# Altium PCB УШЯИ 758727.206-1.PcbDoc (part 1 of 2)
Units mm, origin at the board's own origin, x right, y up, seen from the top; angles counter-clockwise.
Board outline 245 x 230 mm, 2 copper layers (Top Layer, Bottom Layer), stack 1.571 mm thick; 127 components, 117 nets, 572 pads, 132 vias.
Unrouted connection lines stored in the file: 2.
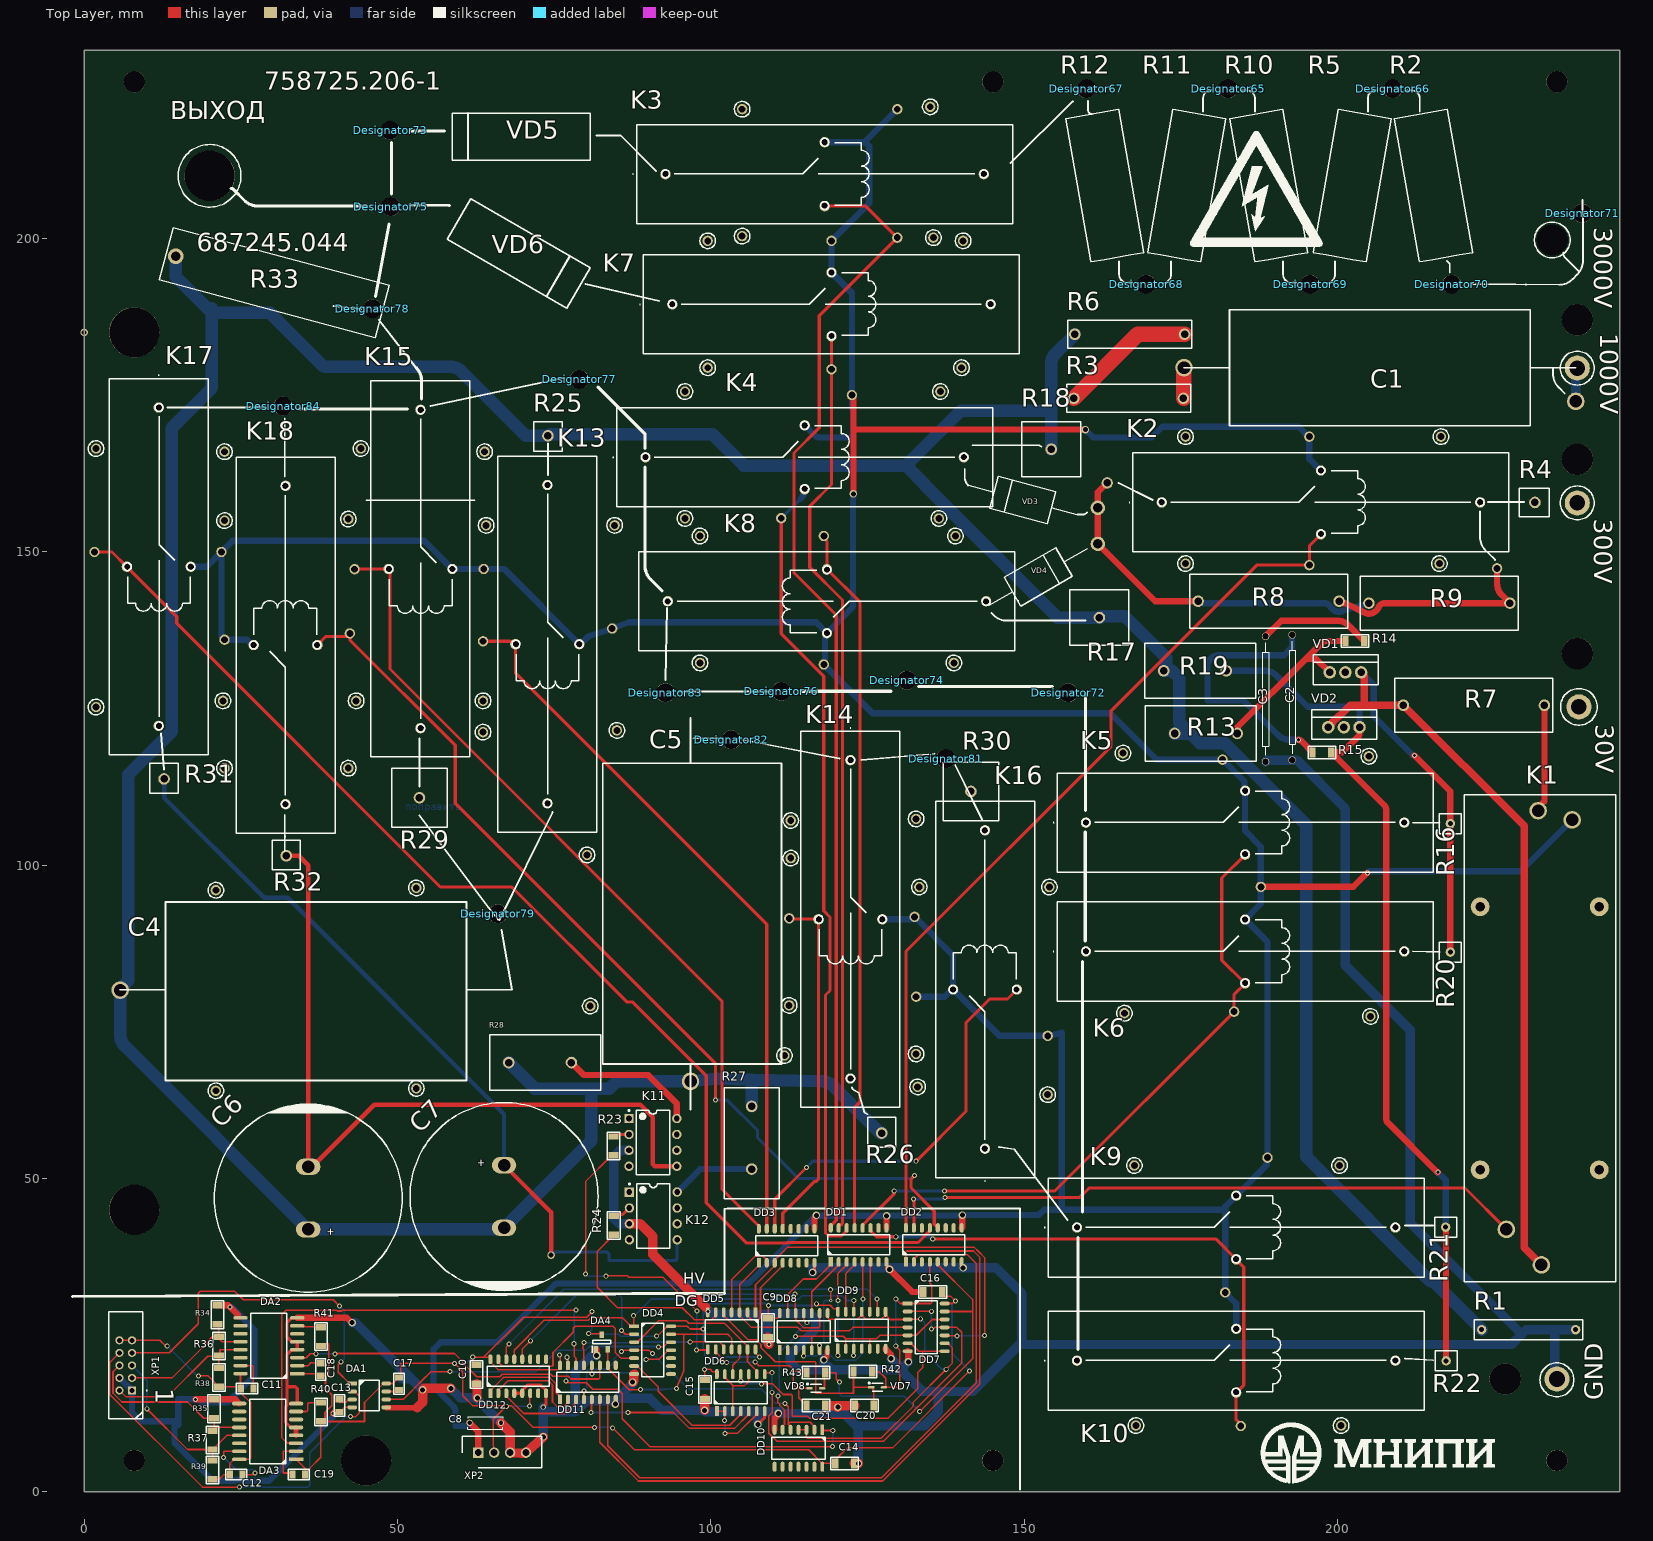
[diagram p0: Top Layer view]
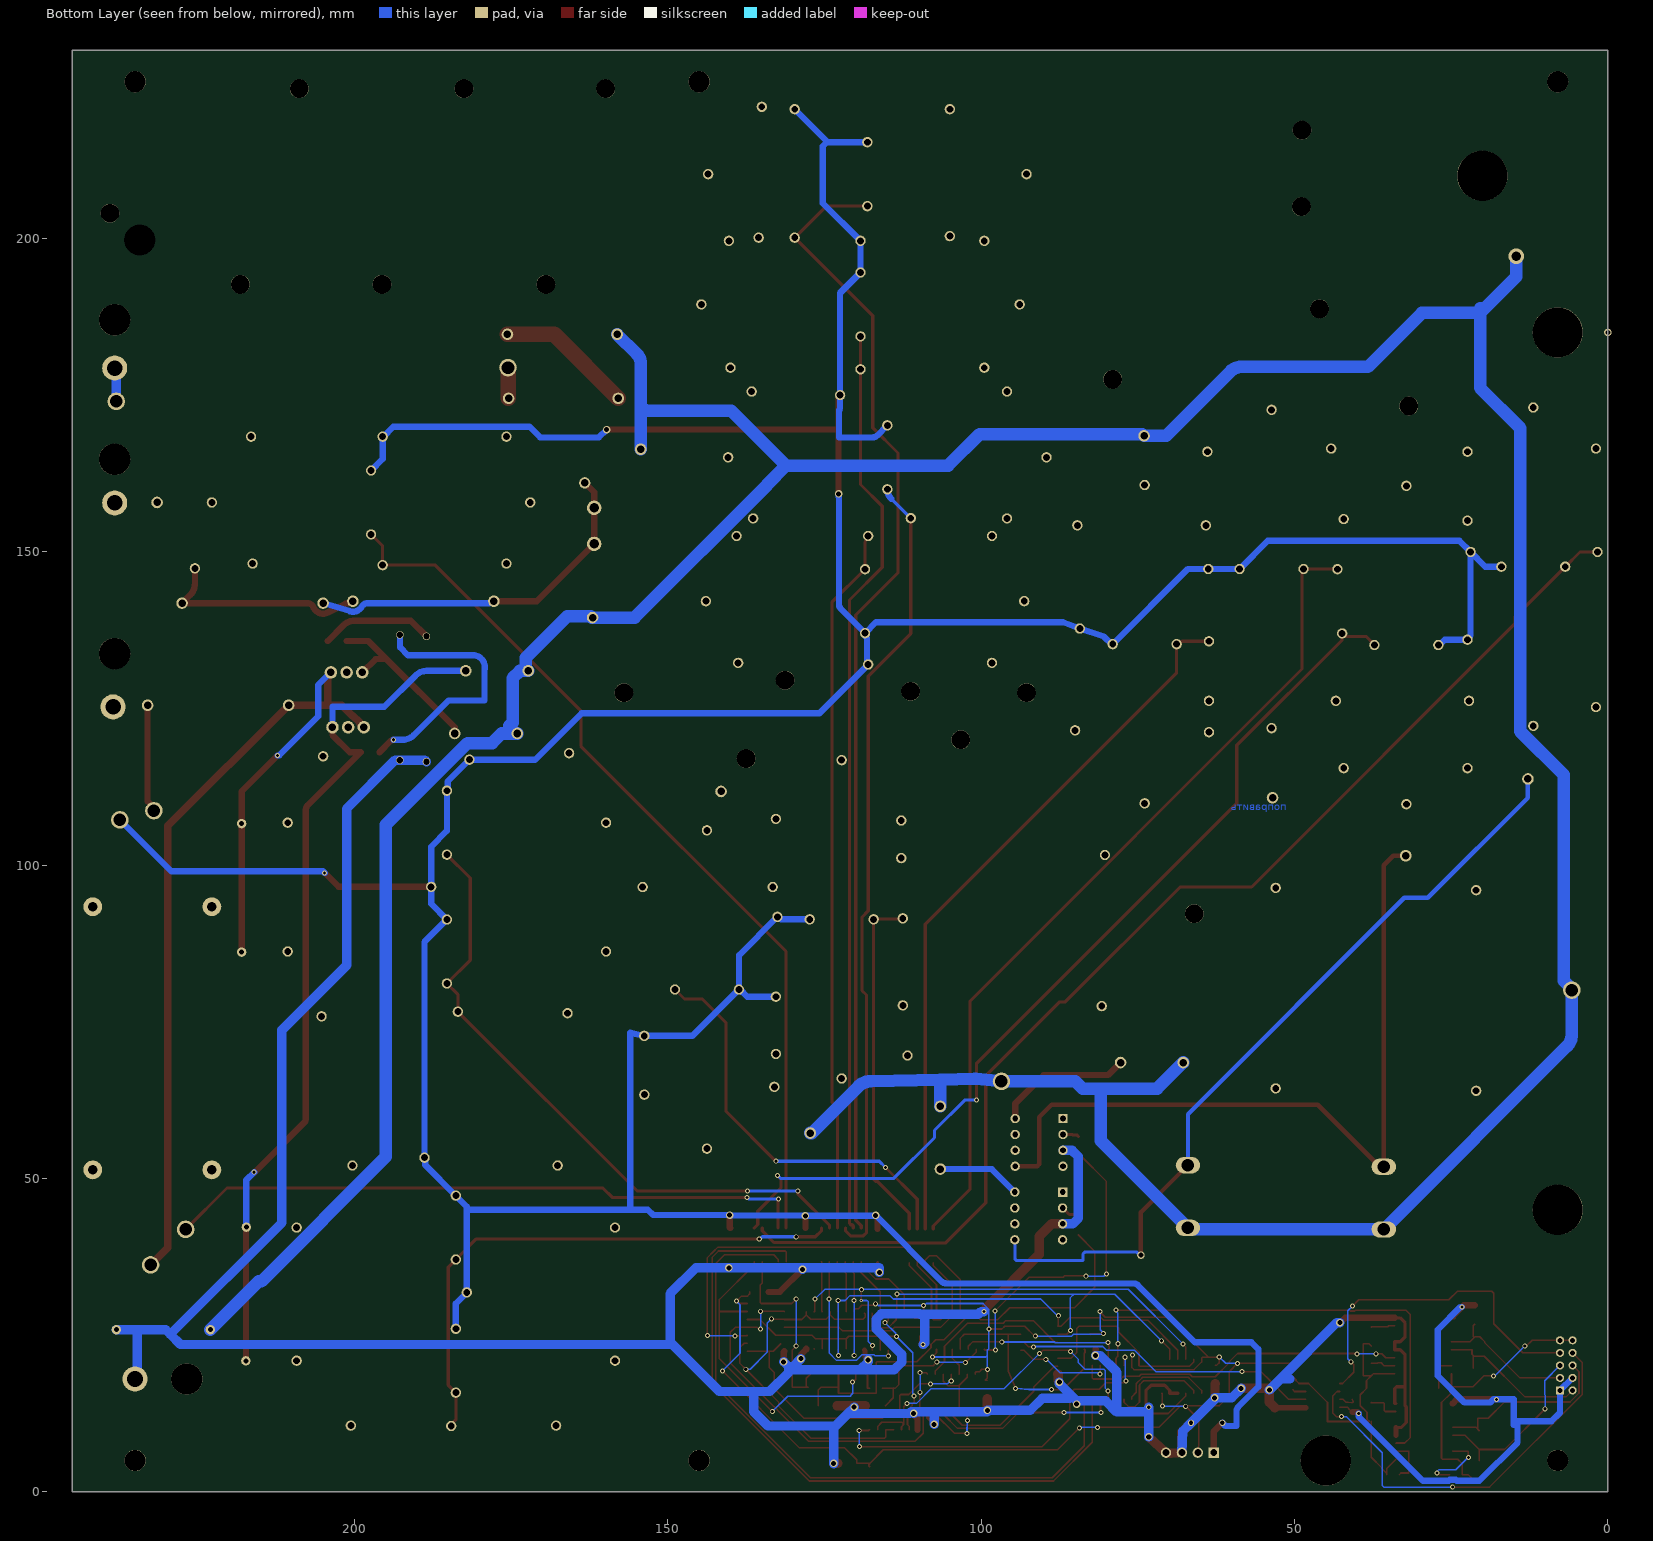
[diagram p1: Bottom Layer view, seen from below]
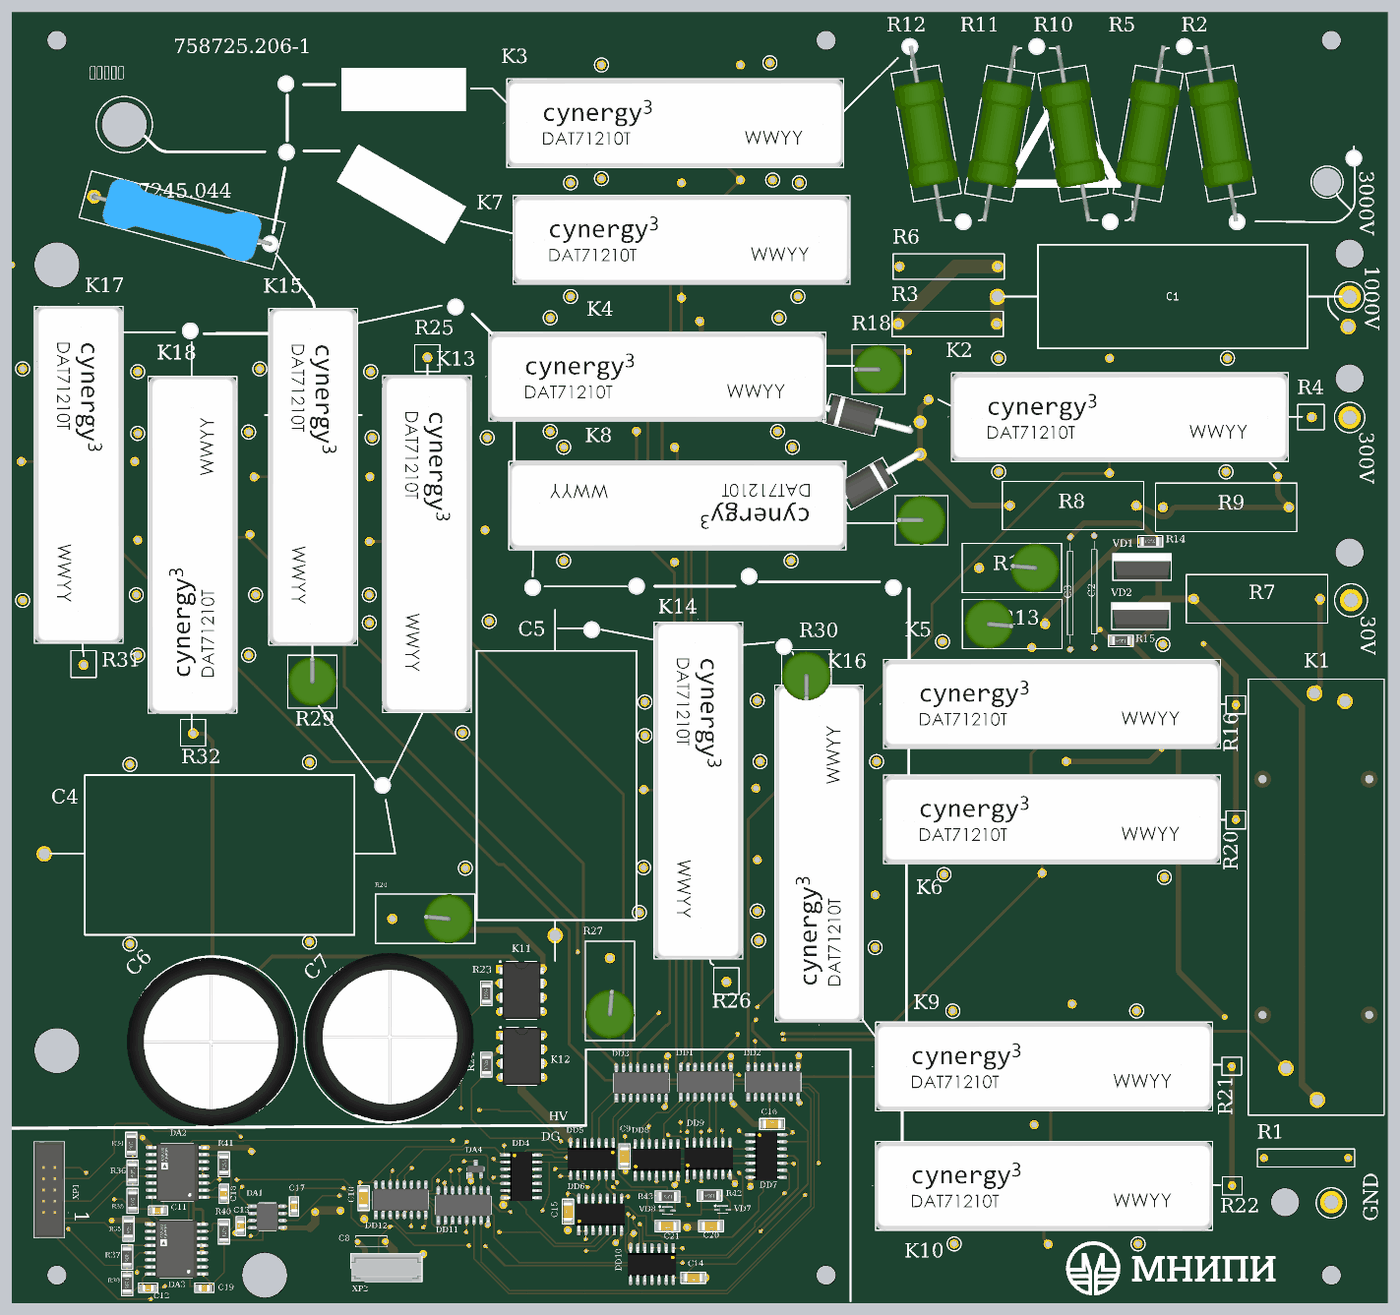
[diagram p3: 3D render of the assembled board from above, using the file's embedded part models]

## Layer stack, top to bottom
Top Solder: solder mask 0.0102, Solder Resist, Dk 3.5
Top Layer: signal copper 0.0356
Dielectric 1: dielectric 1.5, FR-4, Dk 4.8
Bottom Layer: signal copper 0.0356
Bottom Solder: solder mask 0.0102, Solder Resist, Dk 3.5

## Board outline
0,0 0,230 245,230 245,0

## Design rules (kind name [scope] priority, off if disabled: settings)
Clearance [All] p1: gap=0.254 ignorepadtopadclearanceinfootprint=FALSE
PolygonConnect [All] p1: connectstyle=Relief reliefconductorwidth=0.254 reliefentries=4 polygonreliefangle="90 Angle" airgapwidth=0.254
RoutingVias [All] p1: holewidth=0.5 width=0.8 viastyle="Through Hole" minholewidth=0.5 minwidth=0.8 maxholewidth=0.5 maxwidth=0.8
SolderMaskExpansion [All] p1: expansion=0.102 istentingtop=FALSE
SupplyNets "Schematic Supply Nets_1" [InNet('+3.3Vn')] p1: voltage=0.000
SupplyNets "Schematic Supply Nets" [InNet('+5V')] p2: voltage=0.000
SupplyNets "Schematic Supply Nets_41" [InNet('O10')] p3: voltage=0.000
SupplyNets "Schematic Supply Nets_40" [InNet('N14')] p4: voltage=0.000
SupplyNets "Schematic Supply Nets_39" [InNet('O6')] p5: voltage=0.000
SupplyNets "Schematic Supply Nets_38" [InNet('O4')] p6: voltage=0.000
SupplyNets "Schematic Supply Nets_37" [InNet('O7')] p7: voltage=0.000
SupplyNets "Schematic Supply Nets_36" [InNet('O8')] p8: voltage=0.000
SupplyNets "Schematic Supply Nets_35" [InNet('O1')] p9: voltage=0.000
SupplyNets "Schematic Supply Nets_34" [InNet('O3')] p10: voltage=0.000
SupplyNets "Schematic Supply Nets_33" [InNet('O9')] p11: voltage=0.000
SupplyNets "Schematic Supply Nets_32" [InNet('\O10')] p12: voltage=0.000
SupplyNets "Schematic Supply Nets_31" [InNet('\O9')] p13: voltage=0.000
SupplyNets "Schematic Supply Nets_30" [InNet('N13')] p14: voltage=0.000
SupplyNets "Schematic Supply Nets_29" [InNet('O2')] p15: voltage=0.000
SupplyNets "Schematic Supply Nets_28" [InNet('O5')] p16: voltage=0.000
SupplyNets "Schematic Supply Nets_26" [InNet('O14')] p17: voltage=0.000
SupplyNets "Schematic Supply Nets_25" [InNet('GNDI')] p18: voltage=0.000
SupplyNets "Schematic Supply Nets_24" [InNet('O13')] p19: voltage=0.000
SupplyNets "Schematic Supply Nets_12" [InNet('GND')] p20: voltage=0.000
SupplyNets "Schematic Supply Nets_11" [InNet('GNDN')] p21: voltage=0.000
SupplyNets "Schematic Supply Nets_5" [InNet('+12')] p22: voltage=0.000
Width +12 [InNet('+12')] p1: maxlimit=1 minlimit=1 preferedwidth=1
Width [All] p2: maxlimit=2 minlimit=0.25 preferedwidth=0.5
30 further rules are at their usual default settings.

## Classes and differential pairs
component class УШЯИ.687245.044Э3_1: C1 C2 C3 C4 C5 C6 C7 DD1 DD2 DD3 K1 K2 K3 K4 K5 K6 K7 K8 K9 K10 K11 K12 K13 K14 K15 K16 K17 K18 R1 R2 R3 R4 R5 R6 R7 R8 R9 R10 R11 R12 R13 R14 R15 R16 R17 R18 R19 R20 R21 R22 R23 R24 R25 R26 R27 R28 R29 R30 R31 R32 R33 U1 U2 U3 U4 U5 U6 U7 U8 U9 VD1 VD2 VD3 VD4 VD5 VD6 X1 X2 X3 X4 X5
component class УШЯИ.687245.044Э3_2: C8 C9 C10 C11 C12 C13 C14 C15 C16 C17 C18 C19 C20 C21 DA1 DA2 DA3 DA4 DD4 DD5 DD6 DD7 DD8 DD9 DD10 DD11 DD12 R40 R41 R42 R43 VD7 VD8 XP1 XP2

## Components (designator, comment, footprint, x,y, rotation, side; value= is the part's Value field where it differs from the comment)
C1 "К73-14М-4 кВ-0,033 мкФ +-10%" "К73-14М-4 кВ-D18" 206.742,179.365 r0 top
C2 "К73-17-250 В-0,47 мкФ +-20%" К73-17-А20 192.75,136.75 r270 top
C3 "К73-17-250 В-0,47 мкФ +-20%" К73-17-А20 188.5,136.5 r270 top
C4 "К73-14М-4 кВ-0,1 мкФ +-10%" "К73-14М-4 кВ-D28" 36.992,80.115 r180 top
C5 "К73-14М-4 кВ-0,1 мкФ +-10%" "К73-14М-4 кВ-D28" 96.75,92.25 r270 top
C6 "LGG2G331MELB30" "CAP TH ALUM ELEC D30.00mm S10.00mm H30.00mm" 35.742,46.865 r270 top
C7 "LGG2G331MELB30" "CAP TH ALUM ELEC D30.00mm S10.00mm H30.00mm" 66.992,47.115 r90 top
C8 "К10-17б-M1500-1200 пФ +-5%" К10-17Б-L5.6 61.5,11 r0 top
C9 "1206-X7R-50 B-0,33 мкФ+-10%" "CAP: 1206" 109.1,26.175 r90 top value="0,33 мкФ"
C10 "1206-X7R-50 B-0,33 мкФ+-10%" "CAP: 1206" 62.625,18.725 r90 top value="0,33 мкФ"
C11 "0805-X7R-25 В-0,1 мкФ +-10%" "CAP: 0805" 26,16.5 r180 top value="0,1 мкФ"
C12 "0805-X7R-25 В-0,1 мкФ +-10%" "CAP: 0805" 24.25,2.75 r180 top value="0,1 мкФ"
C13 "0805-X7R-25 В-0,1 мкФ +-10%" "CAP: 0805" 40.75,13.75 r90 top value="0,1 мкФ"
C14 "1206-X7R-50 B-0,33 мкФ+-10%" "CAP: 1206" 121.35,4.55 r180 top value="0,33 мкФ"
C15 "1206-X7R-50 B-0,33 мкФ+-10%" "CAP: 1206" 99.025,16.325 r90 top value="0,33 мкФ"
C16 "1206-X7R-50 B-0,33 мкФ+-10%" "CAP: 1206" 135.4,31.9 r0 top value="0,33 мкФ"
C17 "0805-X7R-25 В-0,1 мкФ +-10%" "CAP: 0805" 50.25,17.25 r270 top value="0,1 мкФ"
C18 "0805-X7R-25 В-0,1 мкФ +-10%" "CAP: 0805" 37.75,19.5 r270 top value="0,1 мкФ"
C19 "0805-X7R-25 В-0,1 мкФ +-10%" "CAP: 0805" 34.25,2.75 r0 top value="0,1 мкФ"
C20 "1206-X7R-50 B-0,33 мкФ+-10%" "CAP: 1206" 124.5,13.75 r180 top value="0,33 мкФ"
C21 "1206-X7R-50 B-0,33 мкФ+-10%" "CAP: 1206" 116.75,13.75 r180 top value="0,33 мкФ"
DA1 "ADuM1100AR" 8-SOIC 45.475,15.375 r0 top
DA2 "ADM2486BRWZ" 16-SOIC-W 33.996,18.862 r180 top
DA3 "ADM2486BRWZ" 16-SOIC-W 33.806,5.19 r180 top
DA4 "MAX809S" SOT-23-3 81.65,22.75 r90 top
DD1 "ULQ2003AD" 16-SOIC 123.567,39.39 r90 top
DD2 "ULQ2003AD" 16-SOIC 135.567,39.39 r90 top
DD3 "ULQ2003AD" 16-SOIC 112.092,39.265 r90 top
DD4 "IN74HC08AD" 14-SOIC 87.75,26.415 r0 top
DD5 "IN74HC04AD" 14-SOIC 107.115,28.625 r270 top
DD6 "IN74HC00AD" 14-soic 100.955,12.875 r90 top
DD7 "IN74HC02AD" 14-SOIC 131.4,30.04 r0 top
DD8 "IN74HC02AD" 14-SOIC 111,22.6 r90 top
DD9 "IN74HC02AD" 14-SOIC 120.26,22.825 r90 top
DD10 "IN74HC86AD" 14-SOIC 117.785,9.9 r270 top
DD11 "IN74HC595AD" 16-SOIC 80.375,17.45 r90 top
DD12 "IN74HC138AD" 16-SOIC 69.26,18.438 r90 top
Designator65 "Comment" "Стойка 301421.021" 182.524,223.901 r180 top locked
Designator66 "Comment" "Стойка 301421.021" 208.813,223.901 r180 top locked
Designator67 "Comment" "Стойка 301421.021" 159.918,223.901 r180 top locked
Designator68 "Comment" "Стойка 301421.021" 169.443,192.659 r180 top locked
Designator69 "Comment" "Стойка 301421.021" 195.605,192.659 r180 top locked
Designator70 "Comment" "Стойка 301421.021" 218.211,192.659 r180 top locked
Designator71 "Comment" "Стойка 301421.021" 239,204 r180 top
Designator72 "Comment" "Стойка 301421.021" 157,127.5 r180 top
Designator73 "Comment" "Стойка 301421.021" 48.8,217.275 r0 top
Designator74 "Comment" "Стойка 301421.021" 131.275,129.5 r180 top locked
Designator75 "Comment" "Стойка 301421.021" 48.9,205.075 r0 top
Designator76 "Comment" "Стойка 301421.021" 111.25,127.75 r180 top
Designator77 "Comment" "Стойка 301421.021" 79,177.5 r180 top
Designator78 "Comment" "Стойка 301421.021" 46,188.75 r0 top
Designator79 "Comment" "Стойка 301421.021" 66,92.25 r180 top
Designator81 "Comment" "Стойка 301421.021" 137.5,117 r180 top
Designator82 "Comment" "Стойка 301421.021" 103.25,120 r180 top
Designator83 "Comment" "Стойка 301421.021" 92.75,127.5 r180 top
Designator84 "Comment" "Стойка 301421.021" 31.75,173.25 r180 top
K1 "УШЯИ.685442.092vs2Rel" УШЯИ.685442.092vs2Rel 232.242,96.365 r270 top
K2 "DAR71210TU" DAR71210TU 171.942,157.865 r0 top
K3 "DAR71210TU" DAR71210TU 92.75,210.25 r0 top
K4 "DAR71210TU" DAR71210TU 89.567,165.065 r0 top
K5 "DAR71210TU" DAR71210TU 159.842,106.765 r0 top
K6 "DAR71210TU" DAR71210TU 159.842,86.215 r0 top
K7 "DAR71210TU" DAR71210TU 93.842,189.465 r0 top
K8 "DAR71210TU" DAR71210TU 143.917,142.115 r180 top
K9 "DAR71210TU" DAR71210TU 158.417,42.165 r0 top
K10 "DAR71210TU" DAR71210TU 158.417,20.915 r0 top
K11 "TLP3549F" 8-DIP 90.75,55.75 r0 top
K12 "TLP3549F" 8-DIP 90.81,44.02 r0 top
K13 "DAR71210TU" DAR71210TU 73.9,160.65 r270 top
K14 "DAR71210TU" DAR71210TU 122.25,116.75 r270 top
K15 "DAR71210TU" DAR71210TU 53.65,172.65 r270 top
K16 "DAR71210TU" DAR71210TU 143.75,54.75 r90 top
K17 "DAR71210TU" DAR71210TU 11.892,173.015 r270 top
K18 "DAR71210TU" DAR71210TU 32.142,109.715 r90 top
R1 "С2-33Н-0,5-270 Ом +-5%" "С2-33Н-0,5АИ (140.02.0203.00.00)" 230.492,25.865 r180 top value="430 Ом"
R2 "С2-33-2-1,2 кОм +-5%" С2-33-2-NC 215.29,208.407 r280 top locked
R3 "С2-33Н-1-10 кОм +-5%" "С2-33Н-1АИ (140.02.0204.00.00)" 166.65,174.475 r180 top
R4 "С2-33Н-1-15 Ом +-5%" С2-33Н-1АИ-1PIN 231.492,157.865 r180 top
R5 "С2-33-2-1,2 кОм +-5%" С2-33-2-NC 202.336,208.407 r260 top locked
R6 "С2-33Н-1-10 кОм +-5%" "С2-33Н-1АИ (140.02.0204.00.00)" 166.825,184.7 r180 top
R7 "С2-33-2-15 Ом +-5%" "С2-33-2 (140.02.0206.00.00)" 221.75,125.5 r180 top
R8 "С2-33-2-300 Ом +-5%" "С2-33-2 (140.02.0206.00.00)" 188.992,142.115 r180 top
R9 "С2-33-2-300 Ом +-5%" "С2-33-2 (140.02.0206.00.00)" 216.25,141.8 r180 top
R10 "С2-33-2-1,2 кОм +-5%" С2-33-2-NC 189.001,208.407 r280 top locked
R11 "С2-33-2-1,2 кОм +-5%" С2-33-2-NC 175.92,208.407 r260 top locked
R12 "С2-33-2-1,2 кОм +-5%" С2-33-2-NC 162.839,208.407 r280 top locked
R13 "С2-33-2-15 кОм +-5%" С2-33-2-2PIN 174,121 r0 top
R14 "1206-10 Ом+-5%" 1206 202.75,135.75 r0 top value="10 Ом"
R15 "1206-10 Ом+-5%" 1206 197.5,118 r180 top value="10 Ом"
R16 "С2-33Н-0,5-3 Ом +-5%" С2-33Н-0,5АИ-1PIN 217.992,106.615 r180 top value="3 Ом"
R17 "С2-33-2-470 кОм +-5%" С2-33-2-1PIN 162,139.5 r0 top
R18 "С2-33-2-470 кОм +-5%" С2-33-2-1PIN 154.325,166.35 r0 top
R19 "С2-33-2-15 кОм +-5%" С2-33-2-2PIN 182.25,131 r180 top
R20 "С2-33Н-0,5-3 Ом +-5%" С2-33Н-0,5АИ-1PIN 217.992,86.115 r180 top value="3 Ом"
R21 "С2-33Н-0,5-3 Ом +-5%" С2-33Н-0,5АИ-1PIN 217.25,42.225 r180 top value="3 Ом"
R22 "С2-33Н-0,5-3 Ом +-5%" С2-33Н-0,5АИ-1PIN 217.325,20.9 r180 top value="3 Ом"
R23 "1206-470 Ом+-5%" 1206 84.475,55.2 r90 top value="470 Ом"
R24 "1206-470 Ом+-5%" 1206 84.5,42.5 r90 top value="470 Ом"
R25 "С2-33Н-1-1 МОм +-5%" С2-33Н-1АИ-1PIN 74,168.5 r270 top
R26 "С2-33Н-1-1 МОм +-5%" С2-33Н-1АИ-1PIN 127.25,57.25 r90 top
R27 "С2-33-2-1,2 кОм +-5%" С2-33-2-2PIN 106.5,51.5 r90 top
R28 "С2-33-2-1,2 кОм +-5%" С2-33-2-2PIN 77.75,68.5 r180 top
R29 "С2-33-2-3,3 кОм +-5%" С2-33-2-1PIN 53.5,110.75 r270 top
R30 "С2-33-2-3,3 кОм +-5%" С2-33-2-1PIN 141.5,111.75 r90 top
R31 "С2-33Н-1-1 кОм +-5%" С2-33Н-1АИ-1PIN 12.75,113.75 r90 top
R32 "С2-33Н-1-1 кОм +-5%" С2-33Н-1АИ-1PIN 32.25,101.5 r90 top
R33 "Р1-32-1-18 МОм +-5%" R1-32-1_(140.0210) 30.304,192.956 r345 top
R34 "1206-1 кОм+-5%" 1206 21.25,28.25 r270 top value="1 кОм"
R35 "1206-1 кОм+-5%" 1206 20.75,13.25 r270 top value="1 кОм"
R36 "1206-100 Ом+-5%" 1206 21.5,23.25 r270 top value="100 Ом"
R37 "1206-100 Ом+-5%" 1206 20.5,8.25 r270 top value="100 Ом"
R38 "1206-1 кОм+-5%" 1206 21.5,18.25 r270 top value="1 кОм"
R39 "1206-1 кОм+-5%" 1206 20.5,3.5 r270 top value="1 кОм"
R40 "1206-12 кОм+-5%" 1206 37.75,12.75 r90 top value="12 кОм"
R41 "1206-12 кОм+-5%" 1206 37.75,24.75 r90 top value="12 кОм"
R42 "1206-22 кОм+-5%" 1206 124.25,19.175 r180 top value="22 кОм"
R43 "1206-22 кОм+-5%" 1206 116.75,19 r180 top value="22 кОм"
VD1 "20ETF08/IR" TO-220 201.25,130.75 r0 top
VD2 "20ETF08/IR" TO-220 201,122 r0 top
VD3 "BY255/Taw" DO-201-NC 149.75,158.25 r345 top
VD4 "BY255/Taw" DO-201-NC 152.25,146 r210 top
VD5 "HVM8" HVM8 69.75,216.25 r180 top
VD6 "HVM8" HVM8 69.357,197.6 r150 top
VD7 "1N4148WS" SOD-323F 126.6,16.661 r0 top
VD8 "1N4148WS" SOD-323F 116.75,16.5 r0 top
XP1 "BH2-10" DS1014-10S 7.625,16.175 r90 top
XP2 "280371-2" 280371-2 62.88,6.25 r0 top

## Footprints (in the part's own frame and the unit in brackets; to place one, negate y for a bottom-side part, rotate by r counter-clockwise, add the part's x,y. Pads: shape width x height; smd on the part's side, far side on the other; paste and mask are expansions set on the pad)
8-DIP [mm] "DIP, 8-Pin, Row Spacing 7.62 mm, Pitch 2.54 mm"
  rect 1.5x1.5 hole 0.9: 1(-3.81,3.81)
  round 1.5 hole 0.9: 2(-3.81,1.27) 3(-3.81,-1.27) 4(-3.81,-3.81) 5(3.81,-3.81) 6(3.81,-1.27) 7(3.81,1.27) 8(3.81,3.81)
  silkscreen extent -3.93,-5.15 2.65,5.23, body extent -3.91,-5.12 3.96,5.04, height 5.33
8-SOIC [mm] "Body 3.9mmx4.9mm 1.27 pitch"
  rect 1.525x0.65 smd: 1(-2.712,1.905)
  oval 1.525x0.65 smd: 2(-2.712,0.635) 3(-2.712,-0.635) 4(-2.712,-1.905) 5(2.712,-1.905) 6(2.712,-0.635) 7(2.712,0.635) 8(2.712,1.905)
  silkscreen extent -1.6,-2.45 1.6,2.45, body extent -3,-2.45 3,2.45, height 1.75
14-SOIC [mm] "Body 8.6x3.9mm, pitch 1.27 mm"
  rect 1.6x0.6 smd: 1(0,0)
  rrect100% 1.6x0.6 smd: 2(0,-1.27) 3(0,-2.54) 4(0,-3.81) 5(0,-5.08) 6(0,-6.35) 7(0,-7.62) 8(5.9,-7.62) 9(5.9,-6.35) 10(5.9,-5.08) 11(5.9,-3.81) 12(5.9,-2.54) 13(5.9,-1.27) 14(5.9,0)
  round 0.5 on Mech13: ""(0.5,0)
  silkscreen extent 1.2,-8.05 4.7,0.45, body extent -0.12,-8.15 6.02,0.55, height 1.78
14-soic [mm] "Body 8.6x3.9mm, pitch 1.27 mm"
  rect 1.6x0.6 smd: 1(0,0)
  rrect100% 1.6x0.6 smd: 2(0,-1.27) 3(0,-2.54) 4(0,-3.81) 5(0,-5.08) 6(0,-6.35) 7(0,-7.62) 8(5.9,-7.62) 9(5.9,-6.35) 10(5.9,-5.08) 11(5.9,-3.81) 12(5.9,-2.54) 13(5.9,-1.27) 14(5.9,0)
  round 0.5 on Mech13: ""(0.5,0)
  silkscreen extent 1.2,-8.05 4.7,0.45, body extent -0.12,-8.15 6.02,0.55, height 1.78
16-SOIC [mm] "Body 3.9mm×9.9mm 1.27 pitch"
  rect 1.525x0.65 smd: 1(-2.712,4.445)
  oval 1.525x0.65 smd: 2(-2.712,3.175) 3(-2.712,1.905) 4(-2.712,0.635) 5(-2.712,-0.635) 6(-2.712,-1.905) 7(-2.712,-3.175) 8(-2.712,-4.445) 9(2.712,-4.445) 10(2.712,-3.175) 11(2.712,-1.905) 12(2.712,-0.635) 13(2.712,0.635) 14(2.712,1.905) 15(2.712,3.175) 16(2.712,4.445)
  silkscreen extent -1.6,-4.95 1.6,4.95, body extent -3,-4.95 3,4.95, height 1.75
16-SOIC-W [mm] "RW-16, 16-SOIC WIDE, 1,27 pitch"
  rect 2.298x0.582 smd paste+0: 1(0,0)
  rrect100% 2.298x0.582 smd paste+0: 2(0,-1.27) 3(0,-2.54) 4(0,-3.81) 5(0,-5.08) 6(0,-6.35) 7(0,-7.62) 8(0,-8.89) 9(9.056,-8.89) 10(9.056,-7.62) 11(9.056,-6.35) 12(9.056,-5.08) 13(9.056,-3.81) 14(9.056,-2.54) 15(9.056,-1.27) 16(9.056,0)
  silkscreen extent 1.65,-9.6 7.41,0.71, body extent -1.4,-9.84 10.45,0.96, height 0.25
1206 [mm] "Resistor SMD"
  rect 1x1.6 smd: 1(-1.5,0) 2(1.5,0)
  silkscreen extent -2.2,-1 2.2,1, body extent -1.65,-0.8 1.55,0.8, height 0.47
280371-2 [mm] "AMPMODU 2"
  rect 1.65x1.65 hole 1.1: 1(0,0)
  round 1.65 hole 1.1: 2(2.54,0) 3(5.08,0) 4(7.62,0)
  silkscreen extent -2.54,-2.4 10.16,2.6, body extent -2.41,-2.4 10.04,2.6, height 12.6
"CAP TH ALUM ELEC D30.00mm S10.00mm H30.00mm" [mm] "30mm Diameter 10mm Lead Spacing Aluminum Electrolytic Capacitors Radial, Can , Snap-In"
  oval 2.6x3.9 hole 2: 1(5,0) 2(-5,0)
  silkscreen extent -15,-15 15,15, body extent -14.71,-15.3 15.3,14.7, height 30
"CAP: 0805" [mm]
  rect 1x1.25 smd: 1(-1,0) 2(1,0)
  silkscreen extent -1.7,-0.82 1.7,0.82, body extent -1,-0.62 1,0.63, height 0.78
"CAP: 1206" [mm]
  rect 1x1.6 smd: 1(-1.5,0) 2(1.5,0)
  silkscreen extent -2.2,-1 2.2,1, body extent -1.6,-0.8 1.6,0.8, height 1
DAR71210TU [mm]
  round 1.65 hole 1.1: 3(25.4,-5.1) 4(25.4,5.1) ""(0,0) ""(50.8,0)
  silkscreen extent -5.2,-7.9 55.4,7.9, body extent -4.62,-7.93 55.38,7.87, height 24.9
DO-201-NC [mm]
  silkscreen extent -9.01,-2.65 9.01,2.65, body extent -11.81,-2.75 11.81,2.75, height 0.25
DS1014-10S [mm] "BH2-10 pitch 2mm, 2x5"
  rect 1.3x1.3 hole 0.8: 1(0,0)
  round 1.3 hole 0.8: 2(0,2) 3(2,0) 4(2,2) 5(4,0) 6(4,2) 7(6,0) 8(6,2) 9(8,0) 10(8,2)
  silkscreen extent -4.55,-2.4 12.55,3.7, body extent -4.55,-1.7 12.55,3.7, height 5.6
HVM8 [mm]
  silkscreen extent -11,-3.75 11,3.75, body extent -11,-3.75 11,3.75, height 9.5
R1-32-1_(140.0210) [mm] "Резистор постоянный непроволочный высокоомный Р1-32"
  round 2.5 hole 1.5: 1(-16.25,0) 2(16.25,0)
  silkscreen extent -17.85,-4.3 17.85,4.3, body extent -16.65,-4.3 16.65,4.3, height 17.55
SOD-323F [mm]
  rect 1.006x0.392 smd paste+0 mask+0: 1(-1,0)
  rrect100% 1.006x0.392 smd paste+0 mask+0: 2(1,0)
  silkscreen extent -1.46,-0.65 0.85,0.82, body extent -1.6,-0.73 1.6,0.73, height 0.25
SOT-23-3 [mm]
  rect 1.05x0.7 smd: 1(0,0) 2(0,-1.9) 3(2.3,-0.95)
  silkscreen extent -0.53,-2.41 1.43,0.6, body extent -0.05,-2.41 2.35,0.51, height 1.2
TO-220 [mm]
  round 2 hole 1.2: 1(-2.5,0) 2(0,0) 3(2.5,0)
  silkscreen extent -5.15,-1.95 5.25,2.8, body extent -5,-1.8 5.2,2.7, height 22.06
К10-17Б-L5.6 [mm] "L5,6 W4 A5 /  / M47 2,2пФ - 820 пФ / M1500 33пФ - 2700 пФ / H50 0,15 мкФ - 0,022 мкФ / H90 6800пФ - 0.15 мкФ"
  round 1 hole 0.7: 1(0,0) 2(5,0)
  silkscreen extent -0.3,-1 5.3,1, body extent -0.3,-1 5.3,1, height 4
"К73-14М-4 кВ-D18" [mm]
  silkscreen extent -31.25,-9.25 31.25,9.25, body extent -37.43,-9 36,9, height 23
"К73-14М-4 кВ-D28" [mm]
  silkscreen extent -31.25,-14 31.25,14.5, body extent -37.43,-14 36,14, height 28
К73-17-А20 [mm]
  round 1.2 hole 1: 1(0,0) 2(20,0)
  silkscreen extent 1,-0.5 19,0.5
"С2-33-2 (140.02.0206.00.00)" [mm] "Резисторы постоянные непроволочные общего применения С2-33, производитель \"АО\"НПО\"ЭРКОН\", формовка по ГОСТ 29137-91"
  round 1.85 hole 1.2: 1(-11.25,0) 2(11.25,0)
  silkscreen extent -12.6,-4.3 12.6,4.3, body extent -11.65,-4.3 11.65,4.3, height 9.7
С2-33-2-1PIN [mm] "Резисторы постоянные непроволочные общего применения С2-33 производитель \"АО\"НПО\"ЭРКОН\""
  round 1.85 hole 1.2: 1(0,0)
  silkscreen extent -4.7,-4.4 4.7,4.4, body extent -4.4,-4.4 4.4,4.4, height 27.9
С2-33-2-2PIN [mm] "Резисторы постоянные непроволочные общего применения С2-33 производитель \"АО\"НПО\"ЭРКОН\""
  round 1.85 hole 1.2: 1(0,0) 2(10,0)
  silkscreen extent -4.7,-4.4 13,4.4, body extent -4.77,-4.76 4.76,4.76, height 27.9
С2-33-2-NC [mm] "Резисторы постоянные непроволочные общего применения С2-33, производитель \"АО\"НПО\"ЭРКОН\", формовка по ГОСТ 29137-91"
  silkscreen extent -11.6,-4.3 11.6,4.3, body extent -15.9,-4.4 15.9,4.4, height 8.6
"С2-33Н-0,5АИ (140.02.0203.00.00)" [mm] "Резисторы постоянные непроволочные общего применения С2-33Н АИ, производитель \"АО\"НПО\"ЭРКОН\", формовка по ГОСТ 29137-91"
  round 1.5 hole 0.8: 1(-7.5,0) 2(7.5,0)
  silkscreen extent -8.65,-1.6 8.65,1.6, body extent -7.8,-1.6 7.8,1.6, height 4.7
С2-33Н-0,5АИ-1PIN [mm] "Резисторы постоянные непроволочные общего применения С2-33Н АИ, производитель \"АО\"НПО\"ЭРКОН\""
  round 1.5 hole 0.8: 1(0,0)
  silkscreen extent -1.75,-1.6 1.75,1.6, body extent -1.6,-1.59 1.7,1.59, height 15.85
"С2-33Н-1АИ (140.02.0204.00.00)" [mm] "Резисторы постоянные непроволочные общего применения С2-33Н АИ, производитель \"АО\"НПО\"ЭРКОН\", формовка по ГОСТ 29137-91"
  round 1.85 hole 1.2: 1(-8.75,0) 2(8.75,0)
  silkscreen extent -9.9,-2.25 9.9,2.25, body extent -9.15,-2.25 9.15,2.25, height 5.5
С2-33Н-1АИ-1PIN [mm] "Резисторы постоянные непроволочные общего применения С2-33Н АИ, производитель \"АО\"НПО\"ЭРКОН\""
  round 1.85 hole 1.2: 1(0,0)
  silkscreen extent -2.25,-2.25 2.5,2.25, body extent -2.25,-2.24 2.4,2.24, height 18.55
"Стойка 301421.021" [mm] "ФТ-4 Стойка УШЯИ.301421.021"
  round 3 hole 3 unplated mask-10: 1(0,0)
  body extent -2.26,-2.24 2.26,2.24, height 8.5
УШЯИ.685442.092vs2Rel [mm]
  round 3 hole 1.5 mask-10: 17(3,-9.5) 18(3,9.5) 19(45,-9.5) 20(45,9.5)
  silkscreen extent -14.85,-12.05 62.85,12.15, body extent -14.9,-9.75 62.9,9.75, height 24

## Part data
C6 C7: "330uF, 400V"
DA1: "iCoupler Digital Isolator"
DA2 DA3: "Isolated RS-485 Transceiver,  20 Mbps data rate, SOIC-16-W"
DA4: "Very Low Supply Current / 3-Pin Microprocessor Reset / Monitors"
DD1 DD2 DD3: "High-Current Darlington Transistor Arrays, 16-SOIC"
DD4: "Quad 2-Input AND Gate High-Performance Silicon-Gate CMOS"
DD6: "Quad 2-Input NAND Gate High-Performance Silicon-Gate CMOS."
DD7 DD8 DD9: "Quad 2-Input NOR Gate"
DD10: "Quad 2-Input Exclusive / OR Gate"
DD11: "8-Bit SIPO Register w/ Latch & 3-State"
DD12: "Дешифратор-демультиплексор IN74HC138A / 3-8 с инверсией на выходе"
K2 K3 K4 K5 K6 K7 K8 K9 K10 K13 K14 K15 K16 K17 K18: "HIGH VOLTAGE RELAYS - 10KV"
R1 R3 R4 R6 R16 R20 R21 R22 R25 R26 R31 R32: "Резисторы постоянные непроволочные общего применения С2-33Н АИ, производитель \"АО\"НПО\"ЭРКОН\"", Категории качества=«ОТК», Ряд сопротивлений="Е24, Е96", ТУ="ОЖО.467.173 ТУ"
  R1 R16 R20 R21 R22: Диапазон значений номинальных сопротивлений="от 1 Ом до 5,11 МОм", Номинальная мощность рассеяния="0,5 Вт"
  R3 R4 R6 R25 R26 R31 R32: Диапазон значений номинальных сопротивлений="от 1 Ом до 22 МОм", Номинальная мощность рассеяния="1 Вт"
R2 R5 R7 R8 R9 R10 R11 R12 R13 R17 R18 R19 R27 R28 R29 R30: "Резисторы постоянные непроволочные общего применения С2-33, производитель \"АО\"НПО\"ЭРКОН\"", Диапазон значений номинальных сопротивлений="от 1 Ом до 22 МОм", Категории качества=«ОТК», Номинальная мощность рассеяния="1 Вт", Ряд сопротивлений="Е24, Е96", ТУ="ОЖО.467.173 ТУ"
R33: "Резистор постоянный непроволочный высокоомный Р1-32, производитель \"АО\"НПО\"ЭРКОН\"", Диапазон значений номинальных сопротивлений="от 1 МОм до 1000 МОм", Допускаемое отклонение сопротивления="±5%; ±10%", Категории качества=«ОТК», Номинальная мощность рассеяния="1 Вт", Ряд сопротивлений=Е24, ТУ="АБШК.434110.018 ТУ"
VD1 VD2: "Диод 20ETF08/IR"
VD3 VD4: "Выпрямитель BY255/Taw"
VD5 VD6: "Выпрямитель HVM8"
VD7 VD8: "Small Signal Fast Switching Diod"
XP1: "DS1014-10 Straight", System=Connector
XP2: "Connector", System=Connector
R14 R15 R23 R24 R34 R35 R36 R37 R38 R39 R40 R41 R42 R43: ModelPrint=1206

## Free pads (board coordinates)
  round 2.3 hole 1.5 paste-2539.97 mask+0: 2(161.75,151.25) 2(161.75,157)
  round 1.65 hole 1.1: 23(1.642,149.965) 23(1.892,125.215) 23(1.892,166.465) 23(21.008,63.99) 23(21.008,95.99) 23(21.892,149.965) 23(22.142,126.215) 23(22.392,115.465) 23(22.392,135.965) 23(22.392,154.965) 23(22.392,165.965) 23(42.142,115.465) 23(42.142,155.215) 23(42.392,136.965) 23(43.142,147.215) 23(43.392,126.215) 23(44.142,166.465) 23(52.992,64.365) 23(52.992,96.365) 23(63.642,121.215) 23(63.642,126.215) 23(63.642,135.715) 23(63.75,147.25) 23(63.892,165.965) 23(64.142,154.215) 23(80.242,101.615) 23(80.75,77.5) 23(84.25,137.75) 23(84.642,154.215) 23(85,121.5) 23(95.867,155.315) 23(95.867,175.565) 23(98.267,132.265) 23(98.267,152.515) 23(99.492,179.365) 23(99.492,199.615) 23(104.992,200.365) 23(104.992,220.615) 23(111.225,155.35) 23(111.742,69.615) 23(112.492,77.615) 23(112.5,91.5) 23(112.742,101.115) 23(112.742,107.115) 23(118.017,132.015) 23(118.017,152.515) 23(119.242,179.115) 23(119.242,199.615) 23(122.5,175) 23(129.742,200.115) 23(129.742,220.615) 23(132.5,91.75) 23(132.742,69.865) 23(132.742,107.365) 23(132.75,79) 23(132.992,64.615) 23(133.25,96.5) 23(135,221) 23(135.492,200.115) 23(136.367,155.315) 23(136.617,175.565) 23(138.767,132.265) 23(139.017,152.515) 23(139.992,179.365) 23(140.242,199.615) 23(153.742,63.365) 23(153.75,72.75) 23(154,96.5) 23(165.742,117.865) 23(165.992,76.365) 23(167.567,52.065) 23(167.817,10.565) 23(175.742,148.115) 23(175.742,168.365) 23(181.65,116.825) 23(182.067,31.815) 23(183.492,76.615) 23(184.55,10.5) 23(187.75,96.525) 23(188.817,53.315) 23(195.492,147.865) 23(195.492,168.365) 23(200.317,52.065) 23(200.567,10.565) 23(204.992,117.365) 23(205.242,75.865) 23(216.242,148.115) 23(216.492,168.365) 23(225.45,147.35)
  round 3.4 hole 3.4 unplated: 24(8,5) 24(8,225) 24(145,5) 24(145,225) 24(235,5) 24(235,225)
  round 8 hole 8 unplated: 25(20.008,209.99) 27(8,45) 27(8,185) 27(45.008,4.99)
  round 2.8 hole 2: 26(5.75,80.05) 26(96.75,65.5) 26(175.492,179.365) 26(226.925,41.875) 26(232,108.675) 26(232.525,36.2) 26(237.425,107.225) 26(237.992,179.365) 26(238,174)
  round 2 hole 5 unplated: 28(234.25,199.75)
  round 4 hole 2.5: 38(235,18)
  round 4 hole 2.5 unplated: 38(238.25,157.8) 38(238.25,179.3) 38(238.5,125.25)
  round 5 hole 5 unplated: 39(226.75,18) 39(238.25,133.75) 39(238.25,164.75) 39(238.25,187)
  round 1.8 hole 1.2 unplated: 40(163.25,161)
  round 1.2 hole 0.8 unplated: 42(74.5,37.75) 43(0,185)

## Via types
v1: diameter 0.8, hole 0.5, Top Layer to Bottom Layer, 107 vias
v2: diameter 1.2, hole 0.8, Top Layer to Bottom Layer, 24 vias
v3: diameter 0.5, hole 0.3, Top Layer to Bottom Layer, 1 vias

## Nets (pads, with @x,y where several pads share a name; then routed paths per layer and width w, separated by ;. In a path a pad name is that pad's centre, name@x,y a point inside that pad or via, vN(x,y) a via of type N, cw(c..) or ccw(c..) an arc to the next point about the centre after c; other vN are vias at no path point)
30V: pad.26@232,108.675 R7.1 | length 17.2
  Top Layer w1: pad.26@232,108.675 232,109.162 233,110.162 R7.1@233,125.5
300V: R4.1
1000V: pad.26@237.992,179.365 pad.26@238,174 pad.38@238.25,179.3 | length 5.1
  Bottom Layer w1.5: pad.26@237.992,174.242 pad.26@237.992,179.365
3000V: 
+3.3Vn: C11.2 C12.2 DA1.1 DA2.16 DA3.16 R38.2 R39.2 XP1.7 XP1.9 XP1.10 | length 100
  Top Layer w0.254: XP1.10@5.625,24.175 XP1.9@7.625,24.175 12.075,24.175 13,23.25 v1(13.25,23.25) ; XP1.7@7.625,22.175 13.575,22.175 18.2,26.8 18.2,31.7 18.5,32 24,32 25.369,30.631 39.744,30.631 v1(40.75,29.625) ; v1(18.25,18.5) 19.75,18.5 R38.2@21.5,16.75 24.94,16.75 DA2.16@24.94,18.862 ; R39.2@20.5,2 21.55,2 22.3,2.75 C12.2@23.25,2.75 23.25,4.5 23.94,5.19 DA3.16@24.75,5.19 26.381,5.19 26.53,5.339 26.53,14.25 25,15.78 C11.2@25,16.5 ; v1(41,20.75) 40.525,20.275 40.525,19.081 42.326,17.28 DA1.1@42.763,17.28
  Bottom Layer w0.254: v1(13.25,23.25) 18,18.5 v1(18.25,18.5) ; v1(40.75,29.625) 41.5,28.875 41.5,21.25 v1(41,20.75)
+5V: C9.2 C10.2 C14.2 C15.2 C16.2 C17.1 C18.2 C19.2 DA1.8 DA2.1 DA3.1 DA4.3 DD4.14 DD5.14 DD6.14 DD7.14 DD8.14 DD9.14 DD10.14 DD11.16 DD12.6 DD12.16 R40.1 R41.1 XP2.2 | length 310.2
  Top Layer w0.254: DA3.1@33.806,5.19 35.25,3.746 C19.2@35.25,2.75 35.25,2.875 36.047,3.672 36.047,3.797 37.75,5.5 R40.1@37.75,11.25 ; DA2.1@33.996,18.862 37.388,18.862 C18.2@37.75,18.5 ; R41.1@37.75,23.25 38.123,23.623 38.769,23.623 38.79,23.644 39,23.644 39,18.5 C18.2@37.75,18.5 ; R40.1@38.05,11.225 44.723,11.225 44.723,14.253 47.75,17.28 DA1.8@48.187,17.28 49.283,17.28 49.752,17.749 49.752,17.877 50.125,18.25 C17.1@50.25,18.25 50.5,18.5 50.5,20.5 v1(59.075,20.5) 60.423,19.152 60.423,15.432 ccw(c60.677,15.432) 60.474,15.279 ccw(c60.677,15.432) 60.497,15.253 61.976,13.774 ccw(c62.155,13.954) 62.003,13.751 ccw(c62.155,13.954) 62.155,13.7 67.35,13.7 68.225,13.7 71.65,10.275 v1(81.4,10.275) ; R40.1@38.05,11.25 38.423,11.623 38.423,12.673 39.5,13.75 39.5,15.5 38.5,16.5 38.5,17.75 C18.2@37.75,18.5 ; C10.2@62.625,20.225 62.373,20.225 62,20.598 v1(62,21.525) 62.032,21.493 63.775,21.493 ; XP2.2@65.42,6.25 65.286,7.557 cw(c65.539,7.583) 65.285,7.583 65.285,11.585 v1(67.35,13.65) ; v1(71.075,13.7) 71.12,13.745 71.12,15.681 DD12.6@71.165,15.726 ; v1(75.85,21.825) 75.93,21.745 DD11.16@75.93,20.162 75.93,19.832 75.597,19.498 66.029,19.498 64.815,20.713 DD12.16@64.815,21.15 64.815,21.31 64.632,21.493 63.775,21.493 ; v1(80.5,25.25) 82.575,25.25 82.6,25.225 DA4.3@82.6,25.05 ; v1(81,28.75) 81,28.662 80.2,27.862 70.144,27.862 63.775,21.493 ; v1(84.331,10.175) 87.814,6.692 115.593,6.692 DD10.14@117.785,4.5 ; v1(91.35,24.85) 91.491,24.85 93.056,26.415 DD4.14@93.65,26.415 96.242,26.415 96.682,25.975 98.725,25.975 v1(98.75,26) ; C15.2@99.025,17.825 99.325,17.825 99,18.15 v1(99,19.5) 99.04,19.54 99.908,19.54 100.274,19.174 100.795,19.174 100.955,19.014 DD6.14@100.955,18.775 ; DD5.14@107.115,22.725 107.115,22.185 107.755,21.545 v1(107.755,21.506) ; v1(109.175,29.725) 109.175,27.75 C9.2@109.1,27.675 110.581,27.675 111,28.094 DD8.14@111,28.5 ; v1(116.861,30) 117.009,30 117.259,29.75 119.033,29.75 119.579,29.204 120.1,29.204 120.26,29.044 DD9.14@120.26,28.725 ; DD10.14@117.785,4 117.945,4.16 DD10.14@117.945,4.55 ; DD10.14@117.785,4.39 DD10.14@117.945,4.55 ; C16.2@136.9,31.9 136.9,31.6 137.273,31.227 138.248,31.227 v1(139.05,30.425) 138.902,30.425 138.517,30.04 DD7.14@137.3,30.04 ; v1(141.275,19.3) 128.975,7 121.75,7 119.85,5.1 C14.2@119.85,4.55 DD10.14@117.945,4.55
  Bottom Layer w0.254: v1(59.075,20.5) 60.975,20.5 v1(62,21.525) ; v1(67.35,13.65) 71.025,13.65 v1(71.075,13.7) ; v1(81,28.75) 81,25.854 80.5,25.354 v1(80.5,25.25) 80.583,25.167 85.229,25.167 85.545,24.85 v1(91.35,24.85) ; v1(81.4,10.275) 84.175,10.275 84.275,10.175 v1(84.331,10.175) ; v1(99,19.5) 99,21.75 ; v1(107.755,21.506) 99.244,21.506 99,21.75 ; v1(116.861,30) 116.713,30 116.438,29.725 109.08,29.725 108.753,30.052 99.7,30.052 98.75,29.101 v1(98.75,26) 98.75,22.823 99,22.573 99,21.75 ; v1(139.05,30.425) 138.469,29.844 138.469,22.106 v1(141.275,19.3)
+12: C8.1 DD1.9 DD2.9 DD3.9 K2.4 K3.4 K4.4 K5.4 K6.4 K7.4 K8.4 K9.4 K10.4 K13.4 K14.4 K15.4 K16.4 K17.4 K18.4 pad.23@21.892,149.965 pad.23@22.392,135.965 pad.23@63.75,147.25 pad.23@84.25,137.75 pad.23@118.017,132.015 pad.23@119.242,199.615 pad.23@122.5,175 pad.23@129.742,220.615 pad.23@132.5,91.75 pad.23@132.75,79 pad.23@153.75,72.75 pad.23@181.65,116.825 pad.23@182.067,31.815 pad.23@187.75,96.525 pad.23@188.817,53.315 pad.23@195.492,168.365 pad.26@237.425,107.225 XP2.1 | length 791.2
  Top Layer w1: C8.1@61.5,11 62.88,9.62 XP2.1@62.88,6.25 ; DD3.9@116.537,41.977 116.537,43.758 116.825,44.046 v2(116.825,44.1) ; pad.23@122.5,175 cw(c121.75,174.339) 122.75,174.341 122.75,169.25 ; v2(122.75,159.25) 122.75,169.25 ; DD1.9@128.012,42.102 128.026,42.116 128.026,44.021 v2(128.04,44.035) ; DD2.9@140.012,42.102 140.102,42.192 140.102,44.097 v2(140.14,44.135) ; v2(159.75,169.5) 123,169.5 122.75,169.25 ; pad.23@187.75,96.525 202.525,96.525 v1(204.75,98.75)
  Bottom Layer w1: K17.4@16.992,147.615 19.542,147.615 pad.23@21.892,149.965 ; K18.4@27.042,135.115 26.866,135.115 26.016,135.965 pad.23@22.392,135.965 22.392,136.141 21.892,136.641 pad.23@21.892,149.965 ; C8.1@61.5,11 61,10.5 59.25,10.5 59.25,12.833 ccw(c58.25,12.833) 58.957,13.54 55.75,16.748 55.75,22.75 56.863,23.863 65.887,23.863 74.983,32.958 cw(c75.689,32.25) 75.689,33.25 105.561,33.25 ccw(c105.561,34.25) 106.161,33.45 ccw(c105.561,34.25) 106.268,33.543 v2(116.825,44.1) ; K4.4@114.967,170.165 116.595,168.537 ccw(c117.3,169.246) 117.3,168.246 122.684,168.246 122.684,172.289 ccw(c121.684,172.286) 122.517,172.84 122.517,174.983 pad.23@122.5,175 122.517,191.29 K7.4@119.242,194.565 pad.23@119.242,199.615 125.25,205.623 125.25,214.701 124.601,215.35 K3.4@118.15,215.35 ; v2@116.863,44.072 116.895,44.04 116.917,44.062 116.944,44.035 v2(128.04,44.035) ; v2(122.75,159.25) 122.75,158.75 122.684,158.684 122.684,141.596 cw(c121.684,141.596) 122.391,140.889 K8.4@118.517,137.015 ; 124.601,215.474 pad.23@129.742,220.615 ; K14.4@127.35,91.35 131.924,91.35 132.324,91.75 pad.23@132.5,91.75 138.619,85.631 138.619,80.181 K16.4@138.65,80.15 ; v2@128.126,44.073 128.22,44.073 128.243,44.097 v2@140.102,44.097 ; pad.23@132.75,79 137.324,79 138.474,80.15 K16.4@138.65,80.15 ; v2@140.14,44.175 152.351,44.175 153.176,45 156,45 ; v2(159.75,169.5) 161.004,168.246 170.347,168.246 172.045,169.944 193.783,169.944 195.362,168.365 pad.23@195.492,168.365 195.492,164.815 K2.4@197.342,162.965 ; K10.4@183.817,26.015 183.817,30.028 182.067,31.778 pad.23@182.067,31.815 182.067,45 ; v1(204.75,98.75) 205,99 229.2,99 pad.26@237.425,107.225 ; pad.23@21.892,149.965 23.677,151.75 54.25,151.75 K15.4@58.75,147.25 pad.23@63.75,147.25 67,147.25 K13.4@79,135.25 79.176,135.25 80.391,136.465 pad.23@84.25,137.75 86.927,138.75 116.782,138.75 K8.4@118.517,137.015 ; K8.4@118.517,137.015 118.393,136.891 118.393,136.431 118.2,136.238 118.2,132.658 118.141,132.599 118.141,132.139 pad.23@118.017,132.015 125.787,124.245 163.755,124.245 171.175,116.825 pad.23@181.65,116.825 185.118,113.357 185.118,111.989 K5.4@185.242,111.865 185.242,105.449 187.75,102.941 pad.23@187.75,96.525 187.75,93.823 K6.4@185.242,91.315 188.817,87.74 pad.23@188.817,53.315 188.693,53.191 188.693,52.141 K9.4@183.817,47.265 182.067,45.515 182.067,45 ; K16.4@138.65,80.15 146.05,72.75 pad.23@153.75,72.75 156,73.25 156,45 ; 156,45 182.067,45
\N7: DD5.6 R24.1 | length 31.3
  Top Layer w0.254: R24.1@84.5,41 81.855,38.355 81.855,32.645 85.111,29.389 95.423,29.389 97.368,27.444 100.084,27.444 100.765,28.125 DD5.6@100.765,28.625
\N8: DD5.8 R23.1 | length 49.4
  Top Layer w0.254: v1(80,34.75) 80,49.525 84.175,53.7 R23.1@84.475,53.7 ; v1(83.25,34.404) 83.346,34.5 86.648,34.5 86.898,34.25 92.375,34.25 v1(97.775,28.85) ; v1(97.675,22.625) 99.395,22.625 DD5.8@99.495,22.725
  Bottom Layer w0.254: v1(80,34.75) 80.076,34.75 80.422,34.404 v1(83.25,34.404) ; v1(97.675,22.625) 97.725,22.675 97.725,28.8 v1(97.775,28.85)
\N9: DD3.2 DD5.4 | length 13.2
  Top Layer w0.254: DD5.4@103.305,28.625 103.305,33.837 107.164,37.696 108.211,37.696 108.917,36.99 DD3.2@108.917,36.553
\N10: DD3.4 DD5.2 | length 13.2
  Top Layer w0.254: DD5.2@105.845,28.625 105.845,28.125 106.526,27.444 107.573,27.444 107.919,27.79 107.919,32.577 111.457,36.115 DD3.4@111.457,36.553
\O9: DD3.15 K13.3 pad.23@63.642,135.715 | length 115.2
  Top Layer w0.5: pad.23@63.642,135.715 67.957,135.715 68.422,135.25 K13.3@68.8,135.25 68.8,130.7 108.917,90.583 DD3.15@108.917,41.977
\O10: DD3.13 K14.3 pad.23@112.5,91.5 | length 56.6
  Top Layer w0.5: DD3.13@111.457,41.977 111.457,44.457 116.5,49.5 116.75,49.5 117.15,49.9 K14.3@117.15,91.35 117.075,91.425 112.575,91.425 pad.23@112.5,91.5
CLK_RgV: DA2.3 DD11.11 | length 52.8
  Top Layer w0.254: DA2.3@33.996,21.402 35.439,21.402 36.061,22.025 v1(37,22.025) ; v1(40,22) 40.075,22.075 59.075,22.075 60.371,20.779 60.371,20.64 62.655,18.356 66.289,18.356 66.688,18.755 74.463,18.755 74.762,18.456 77.224,18.456 77.68,18 82.131,18 82.28,18.149 DD11.11@82.28,20.162
  Bottom Layer w0.254: v1(37,22.025) 39.975,22.025 v1(40,22)
CLK_RgV+: DA2.12 R34.2 R36.1 XP1.3 | length 22.6
  Top Layer w0.254: XP1.3@7.625,18.175 14.025,18.175 19.666,23.816 19.666,23.966 20.45,24.75 21.185,24.75 21.992,23.942 DA2.12@24.94,23.942 ; R34.2@21.25,26.75 21.5,26.5 R36.1@21.5,24.75
CLK_RgV-: DA2.13 R36.2 R38.1 XP1.2 | length 25.3
  Top Layer w0.254: XP1.2@5.625,16.175 6.656,15.144 13.212,15.144 19.718,21.65 21.4,21.65 R36.2@21.5,21.75 ; R38.1@21.5,19.75 R36.2@21.5,21.75 ; DA2.13@24.94,22.672 21.672,22.672 21.672,21.922 R36.2@21.5,21.75
DAT_RgV: DA3.3 DD11.14 | length 78.8
  Top Layer w0.254: DA3.3@33.806,7.73 33.743,7.793 32.385,7.793 31.5,8.678 31.5,28.25 32.25,29 40.27,29 40.427,28.844 41.073,28.844 41.23,29 55.301,29 v1(78.5,29) ; v1(78.175,23.625) 78.175,21.637 78.47,21.342 DD11.14@78.47,20.162
  Bottom Layer w0.254: v1(78.175,23.625) 78.175,28.527 78.5,28.852 v1(78.5,29)
DAT_RgV+: DA3.12 R35.2 R37.1 XP1.6 | length 29.2
  Top Layer w0.254: XP1.6@5.625,20.175 4.594,19.144 4.594,15.748 6.017,14.325 16.5,14.325 19.075,11.75 R35.2@20.75,11.75 20.75,10 R37.1@20.5,9.75 21.02,10.27 DA3.12@24.75,10.27
DAT_RgV-: DA3.13 R37.2 R39.1 XP1.5 | length 28.1
  Top Layer w0.254: v1(10,13.25) 16.5,6.75 R37.2@20.5,6.75 ; R39.1@20.5,5 R37.2@20.5,6.75 ; DA3.13@24.75,9 22.75,9 R37.2@20.5,6.75
  Bottom Layer w0.254: XP1.5@7.625,20.175 9.999,17.801 ; 9.999,17.801 cw(c9.819,17.622) 10.073,17.617 v1(10,13.25)
ENB_RgV: DA1.6 DD4.12 | length 49.3
  Top Layer w0.254: DA1.6@48.187,14.74 50.904,14.74 52.381,16.217 52.381,16.23 52.869,16.718 53.782,17.631 55.326,19.175 v1(58.35,19.175) ; v1(91.65,23.1) 91.706,23.156 92.431,23.156 93.15,23.875 DD4.12@93.65,23.875
  Bottom Layer w0.254: v1(58.35,19.175) 72.095,19.175 75.527,22.606 79.994,22.606 80.569,23.181 91.569,23.181 v1(91.65,23.1)
ENB_RgVn: DA1.2 XP1.8 | length 65.4
  Top Layer w0.254: XP1.8@5.625,22.175 4.086,20.636 4.086,15.538 18.874,0.75 v1(24.75,0.75) ; v1(42.5,12.006) 43.352,12.006 43.907,12.56 43.907,15.304 43.201,16.01 DA1.2@42.763,16.01
  Bottom Layer w0.254: v1(24.75,0.75) 35.75,0.75 36,1 36,3.25 36,6.25 41.756,12.006 v1(42.5,12.006)